# Altium PCB PCB_AVlabs AV-GMK MK I_2_2024-01-18 (1).pcbdoc (part 5 of 5)
Units mil, origin at the board's own origin, x right, y up, seen from the top; angles counter-clockwise.
Board outline 17777.1 x 9140.8 mil, 2 copper layers (Top Layer, Bottom Layer); 156 components, 279 nets, 1257 pads, 596 vias.
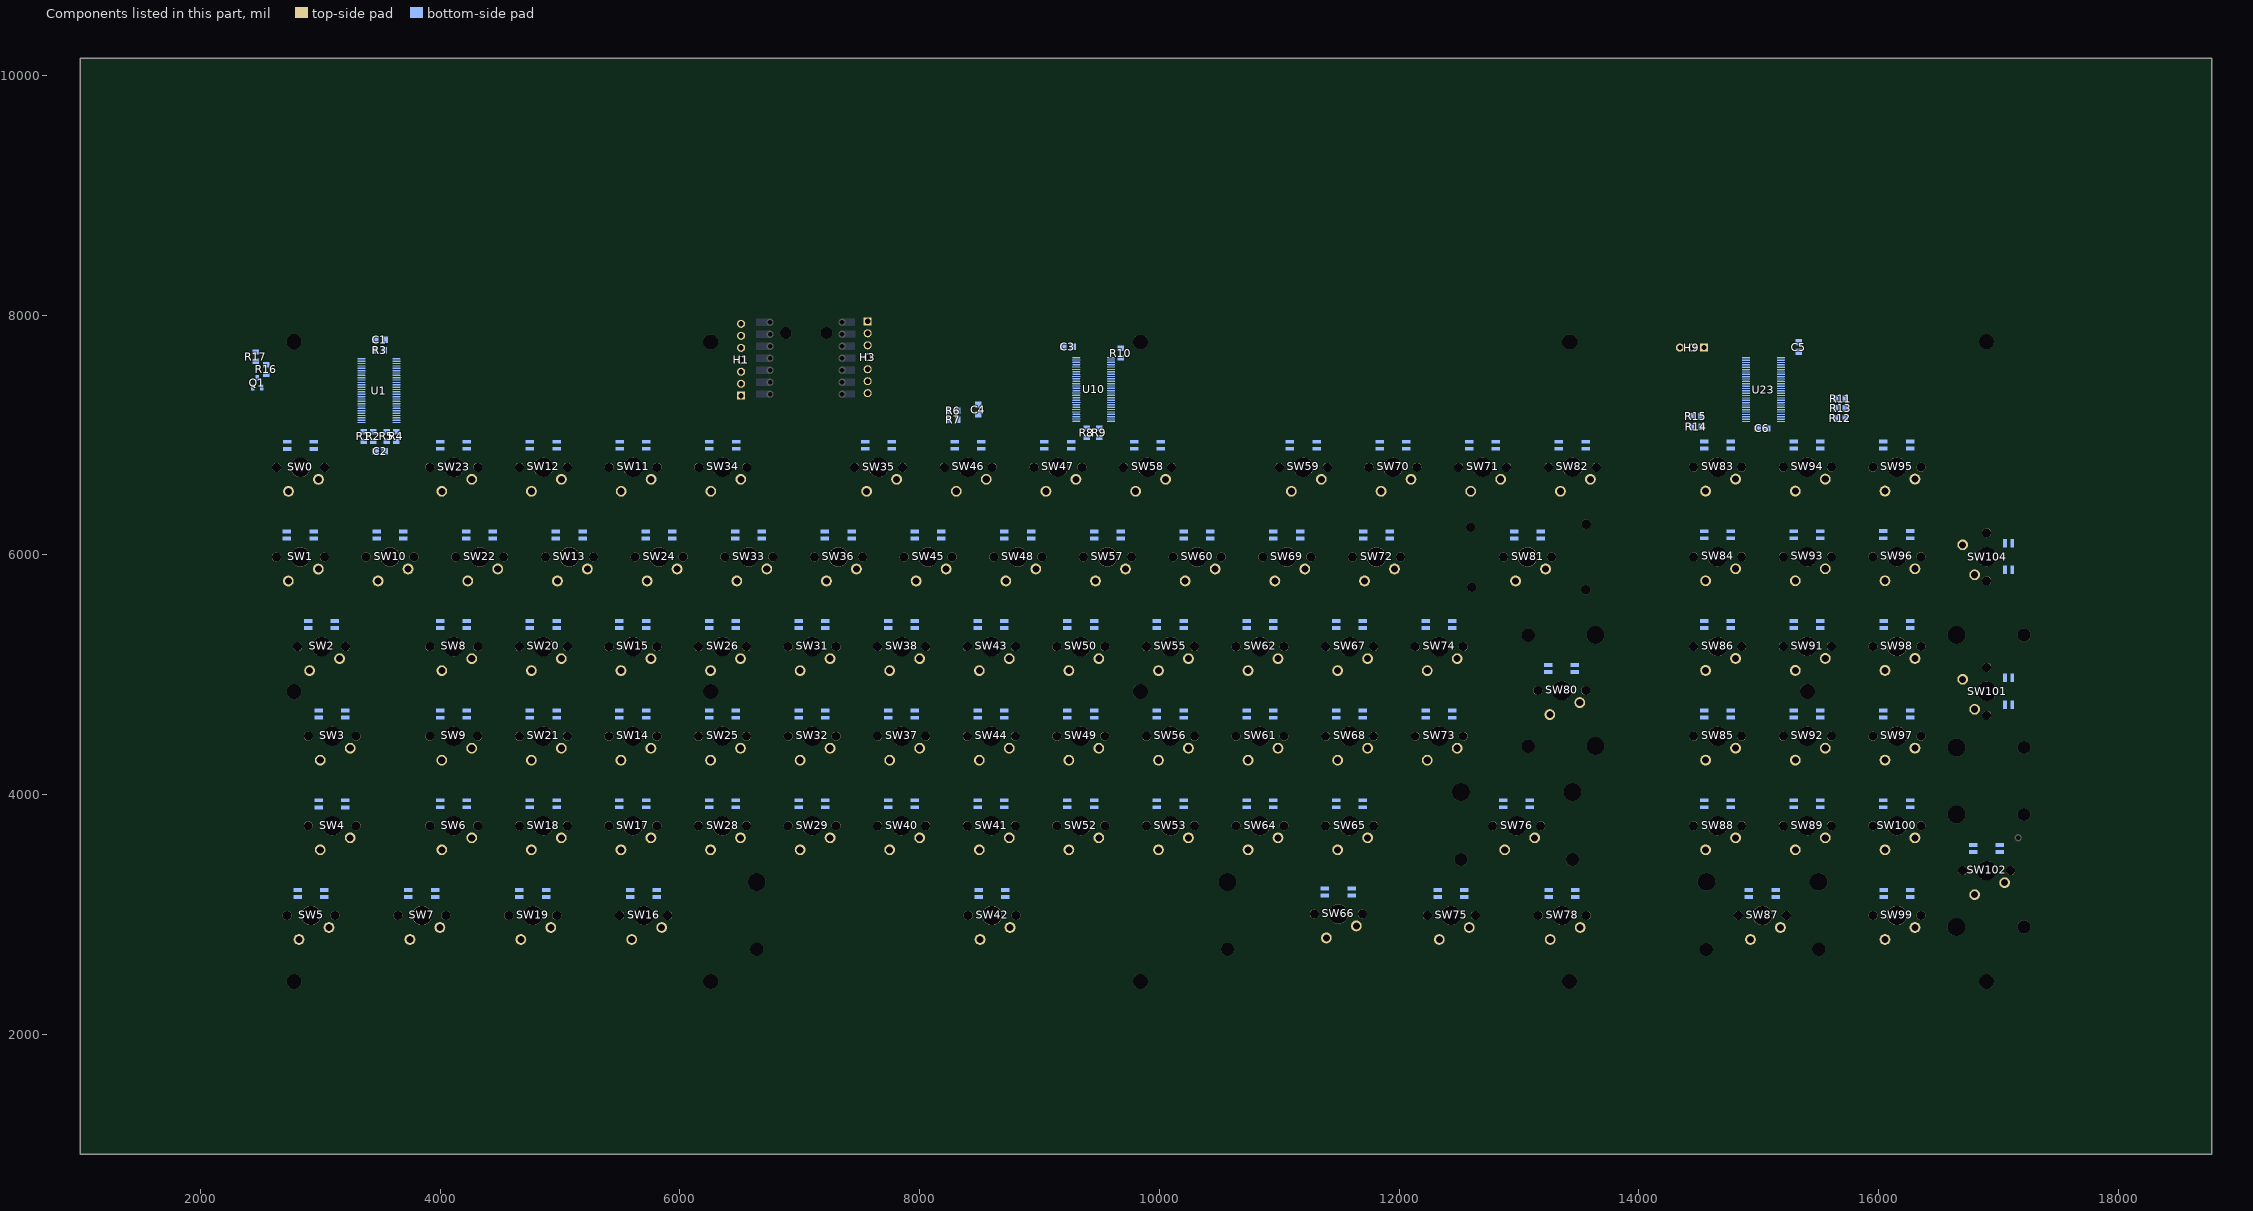
[diagram p5: the components of this part, seen from the top]

## Silkscreen, mask and mechanical layers (free items; w line width, h text height)
Bottom Overlay:
  lines w3.94 net S$91322: 16352.98,7450.1 16352.98,7698.14
  lines w3.94 net S$91326: 15955.7,7651.3 16599.79,7651.3
  lines w10: 6625.09,7211.21 6625.09,8067.9 7473.44,8067.9 7473.44,7211.21 6625.09,7211.21 ; 6860.29,8072.87 6860.29,8127.99 7242.18,8127.99 7242.18,8072.87 6860.29,8072.87
  lines w10 net S$112041: 14974.1,7676.9 14974.1,7981.2 14974.2,7974.8
  lines w10 net S$112045: 15130.3,7684.1 15131.9,7981.9
  lines w10 net S$82865: 8297.4,7618.3 8298.1,7617.6 8696.7,7617.6
  lines w10 net S$82869: 2561.8,7499.3 2964.6,7499.3 ; 8295.3,7471.2 8698.1,7471.2
  text "proudly & painfully" at 5811.93,7924.76 h118.11
  text "A2" at 15279.3,7845.23 h78.74
  text "A1" at 15103.9,7843.33 h78.74
  text "A0" at 14951.9,7840.13 h78.74
  text "clavier financé par les /  finances publiques" at 12038.4,7829.5 h196.85
  text "designed in France*" at 5861,7777.22 h118.11
  text "1" at 2988.9,7720.61 h39.37
  text "(but made in China)" at 5601.22,7683.97 h47.24
  text "0" at 8346.6,7679.91 h39.37
  text "1" at 15259,7679.91 h39.37
  text "0" at 15192.6,7678.52 h39.37
  text "0" at 14871.1,7676.31 h39.37
  text "1" at 14932.5,7676.31 h39.37
  text "1" at 15095.4,7676.31 h39.37
  text "0" at 15027.5,7674.91 h39.37
  text "0" at 2999.8,7653.02 h39.37
  text "A2" at 16031.22,7645.72 h39.37
  text "A1" at 16182.4,7645.72 h39.37
  text "A0" at 16326.1,7645.72 h39.37
  text "ADDR" at 16519.8,7645.72 h39.37
  text "A0" at 3167.5,7634.23 h78.74
  text "(still, assembled in France)" at 5574.14,7627.2 h29.53
  text "1" at 8338.6,7614.31 h39.37
  text "A0" at 8684,7610.13 h78.74
  text "0" at 16169.8,7583.55 h39.37
  text "0x20" at 16530.82,7583.9 h39.37
  text "0" at 16311.78,7582.57 h39.37
  text "0" at 16018.86,7579.94 h39.37
  text "1" at 2660.9,7565.02 h39.37
  text "0" at 8342,7540.31 h39.37
  text "0" at 16171.37,7524.89 h39.37
  text "0x21" at 16532.4,7525.23 h39.37
  text "1" at 16313.35,7523.91 h39.37
  text "0" at 16020.44,7521.27 h39.37
  text "0100 +" at 16853.97,7515.98 h39.37
  text "(c'est faux)" at 11979.1,7496.1 h98.42
  text "0" at 2655.1,7495.41 h39.37
  text "A1" at 2981.2,7489.83 h78.74
  text "1" at 16171.37,7471.73 h39.37
  text "0x22" at 16532.4,7472.1 h39.37
  text "0" at 16313.35,7470.77 h39.37
  text "0" at 16020.44,7468.14 h39.37
  text "1" at 8335,7463.41 h39.37
  text "A1" at 8667.6,7462.43 h78.74
  text "1" at 2658,7424.22 h39.37
  text "1" at 16170.59,7420.56 h39.37
  text "0x23" at 16531.61,7420.9 h39.37
  text "1" at 16312.57,7419.59 h39.37
  text "0" at 16019.65,7416.94 h39.37
  text "0" at 8338.7,7389.72 h39.37
  text "A2" at 2996.1,7351.63 h78.74
  text "0" at 2664.4,7348.41 h39.37
  text "etc..." at 16315.37,7330.37 h39.37 r2
  text "A2" at 8679.6,7325.63 h78.74
  text "1" at 8333.4,7323.11 h39.37
  text "This gap serves            /    no purpose" at 7280.6,6694.7 h59.05 r2
  text "https://github.com/avmolaei/AV-GMK-MKI" at 10359,2506.1 h196.85
Top Solder:
  text "AV-GMK MKI" at 9068.5,2767.47 h196.85
Bottom Solder:
  text "wtf" at 4790.9,7334.2 h59.05 r341
Document:
  drawing of 1205 lines, arcs and shapes, not listed